# EAGLE board SparkFun_Humidity_Sensor_Breakout-HIH-4030_Panel_v10 (EAGLE 7.4.0)
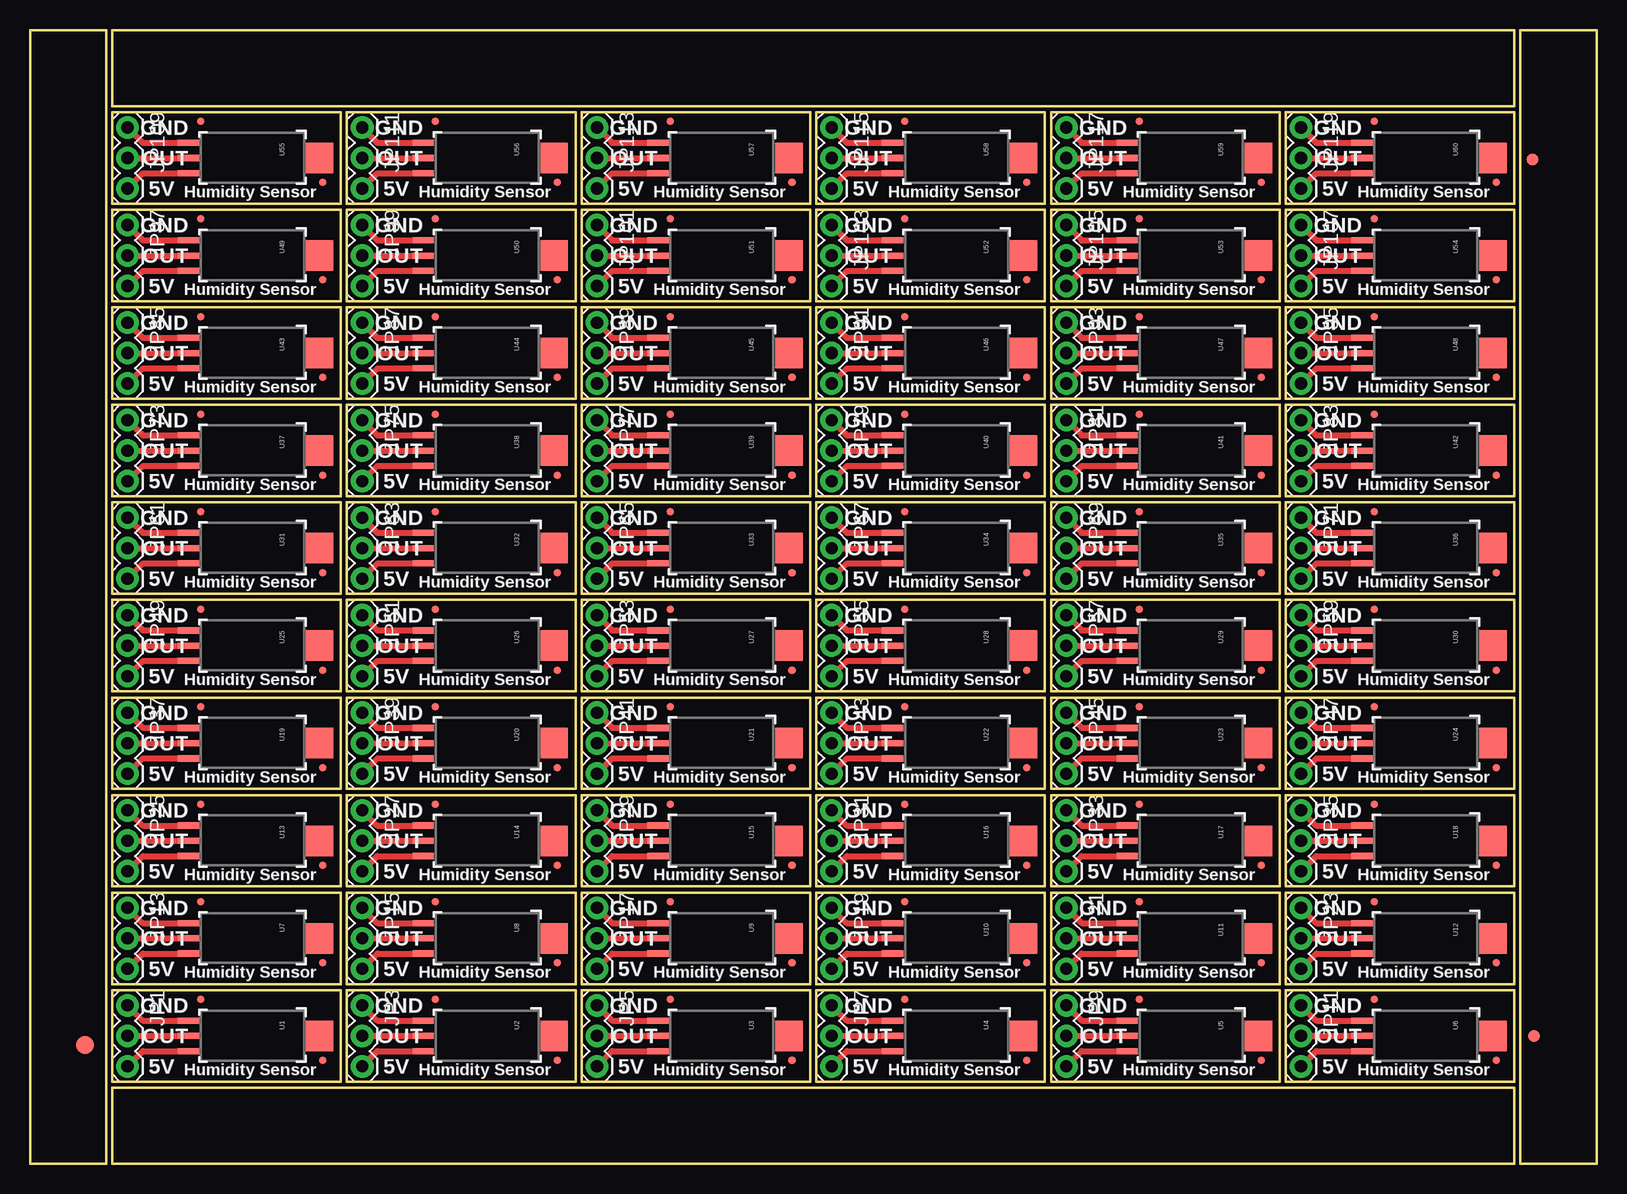
[diagram p0: board, top side]
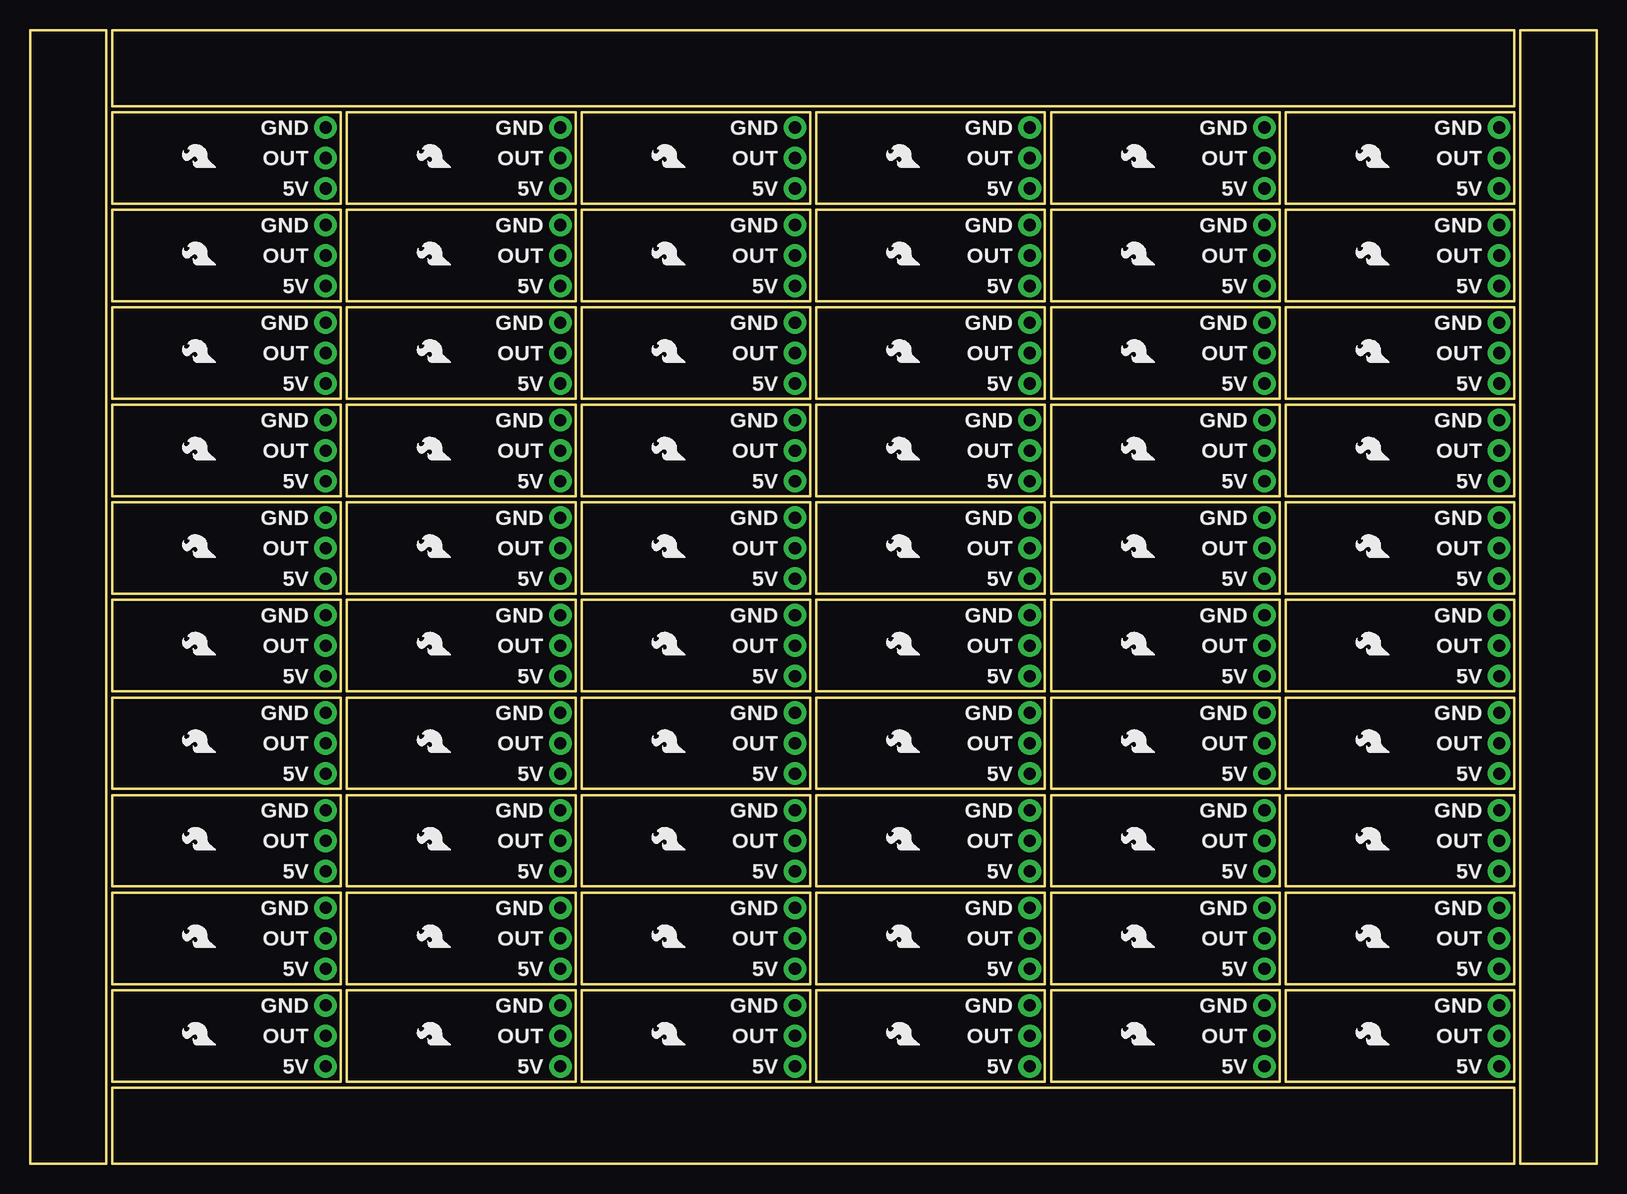
[diagram p1: board, bottom side, seen from below]

Size 130.56 x 94.49 mm. Coordinates in mm from the lower left corner, seen from the top.
Outline: 6.35,79.25 6.35,0 0,0 0,29.72
Outline: 0,27.18 0,94.49 6.35,94.49 6.35,76.71
Outline: 79.25,0 6.86,0 6.86,6.35 29.72,6.35
Outline: 27.18,6.35 123.7,6.35 123.7,0 76.71,0
Outline: 130.56,79.25 130.56,0 124.21,0 124.21,29.72
Outline: 124.21,27.18 124.21,94.49 130.56,94.49 130.56,76.71
Outline: 51.31,94.49 123.7,94.49 123.7,88.14 100.84,88.14
Outline: 103.38,88.14 6.86,88.14 6.86,94.49 53.85,94.49
Outline: 6.86,6.86 25.91,6.86 25.91,14.48 6.86,14.48 6.86,6.86
Outline: 26.42,6.86 45.47,6.86 45.47,14.48 26.42,14.48 26.42,6.86
Outline: 45.97,6.86 65.02,6.86 65.02,14.48 45.97,14.48 45.97,6.86
Outline: 65.53,6.86 84.58,6.86 84.58,14.48 65.53,14.48 65.53,6.86
Outline: 85.09,6.86 104.14,6.86 104.14,14.48 85.09,14.48 85.09,6.86
Outline: 104.65,6.86 123.7,6.86 123.7,14.48 104.65,14.48 104.65,6.86
Outline: 6.86,14.99 25.91,14.99 25.91,22.61 6.86,22.61 6.86,14.99
Outline: 26.42,14.99 45.47,14.99 45.47,22.61 26.42,22.61 26.42,14.99
Outline: 45.97,14.99 65.02,14.99 65.02,22.61 45.97,22.61 45.97,14.99
Outline: 65.53,14.99 84.58,14.99 84.58,22.61 65.53,22.61 65.53,14.99
Outline: 85.09,14.99 104.14,14.99 104.14,22.61 85.09,22.61 85.09,14.99
Outline: 104.65,14.99 123.7,14.99 123.7,22.61 104.65,22.61 104.65,14.99
Outline: 6.86,23.11 25.91,23.11 25.91,30.73 6.86,30.73 6.86,23.11
Outline: 26.42,23.11 45.47,23.11 45.47,30.73 26.42,30.73 26.42,23.11
Outline: 45.97,23.11 65.02,23.11 65.02,30.73 45.97,30.73 45.97,23.11
Outline: 65.53,23.11 84.58,23.11 84.58,30.73 65.53,30.73 65.53,23.11
Outline: 85.09,23.11 104.14,23.11 104.14,30.73 85.09,30.73 85.09,23.11
Outline: 104.65,23.11 123.7,23.11 123.7,30.73 104.65,30.73 104.65,23.11
Outline: 6.86,31.24 25.91,31.24 25.91,38.86 6.86,38.86 6.86,31.24
Outline: 26.42,31.24 45.47,31.24 45.47,38.86 26.42,38.86 26.42,31.24
Outline: 45.97,31.24 65.02,31.24 65.02,38.86 45.97,38.86 45.97,31.24
Outline: 65.53,31.24 84.58,31.24 84.58,38.86 65.53,38.86 65.53,31.24
Outline: 85.09,31.24 104.14,31.24 104.14,38.86 85.09,38.86 85.09,31.24
Outline: 104.65,31.24 123.7,31.24 123.7,38.86 104.65,38.86 104.65,31.24
Outline: 6.86,39.37 25.91,39.37 25.91,46.99 6.86,46.99 6.86,39.37
Outline: 26.42,39.37 45.47,39.37 45.47,46.99 26.42,46.99 26.42,39.37
Outline: 45.97,39.37 65.02,39.37 65.02,46.99 45.97,46.99 45.97,39.37
Outline: 65.53,39.37 84.58,39.37 84.58,46.99 65.53,46.99 65.53,39.37
Outline: 85.09,39.37 104.14,39.37 104.14,46.99 85.09,46.99 85.09,39.37
Outline: 104.65,39.37 123.7,39.37 123.7,46.99 104.65,46.99 104.65,39.37
Outline: 6.86,47.5 25.91,47.5 25.91,55.12 6.86,55.12 6.86,47.5
Outline: 26.42,47.5 45.47,47.5 45.47,55.12 26.42,55.12 26.42,47.5
Outline: 45.97,47.5 65.02,47.5 65.02,55.12 45.97,55.12 45.97,47.5
Outline: 65.53,47.5 84.58,47.5 84.58,55.12 65.53,55.12 65.53,47.5
Outline: 85.09,47.5 104.14,47.5 104.14,55.12 85.09,55.12 85.09,47.5
Outline: 104.65,47.5 123.7,47.5 123.7,55.12 104.65,55.12 104.65,47.5
Outline: 6.86,55.63 25.91,55.63 25.91,63.25 6.86,63.25 6.86,55.63
Outline: 26.42,55.63 45.47,55.63 45.47,63.25 26.42,63.25 26.42,55.63
Outline: 45.97,55.63 65.02,55.63 65.02,63.25 45.97,63.25 45.97,55.63
Outline: 65.53,55.63 84.58,55.63 84.58,63.25 65.53,63.25 65.53,55.63
Outline: 85.09,55.63 104.14,55.63 104.14,63.25 85.09,63.25 85.09,55.63
Outline: 104.65,55.63 123.7,55.63 123.7,63.25 104.65,63.25 104.65,55.63
Outline: 6.86,63.75 25.91,63.75 25.91,71.37 6.86,71.37 6.86,63.75
Outline: 26.42,63.75 45.47,63.75 45.47,71.37 26.42,71.37 26.42,63.75
Outline: 45.97,63.75 65.02,63.75 65.02,71.37 45.97,71.37 45.97,63.75
Outline: 65.53,63.75 84.58,63.75 84.58,71.37 65.53,71.37 65.53,63.75
Outline: 85.09,63.75 104.14,63.75 104.14,71.37 85.09,71.37 85.09,63.75
Outline: 104.65,63.75 123.7,63.75 123.7,71.37 104.65,71.37 104.65,63.75
Outline: 6.86,71.88 25.91,71.88 25.91,79.5 6.86,79.5 6.86,71.88
Outline: 26.42,71.88 45.47,71.88 45.47,79.5 26.42,79.5 26.42,71.88
Outline: 45.97,71.88 65.02,71.88 65.02,79.5 45.97,79.5 45.97,71.88
Outline: 65.53,71.88 84.58,71.88 84.58,79.5 65.53,79.5 65.53,71.88
Outline: 85.09,71.88 104.14,71.88 104.14,79.5 85.09,79.5 85.09,71.88
Outline: 104.65,71.88 123.7,71.88 123.7,79.5 104.65,79.5 104.65,71.88
Outline: 6.86,80.01 25.91,80.01 25.91,87.63 6.86,87.63 6.86,80.01
Outline: 26.42,80.01 45.47,80.01 45.47,87.63 26.42,87.63 26.42,80.01
Outline: 45.97,80.01 65.02,80.01 65.02,87.63 45.97,87.63 45.97,80.01
Outline: 65.53,80.01 84.58,80.01 84.58,87.63 65.53,87.63 65.53,80.01
Outline: 85.09,80.01 104.14,80.01 104.14,87.63 85.09,87.63 85.09,80.01
Outline: 104.65,80.01 123.7,80.01 123.7,87.63 104.65,87.63 104.65,80.01
Copper layers (1*16): Top 0.035mm / dielectric 1.5mm / Bottom 0.035mm
Design rules "SparkFun": minimum track width 8mil, minimum drill 20mil, track to track 8mil, track to pad 8mil, pad to pad 8mil, via to via 8mil, smd to smd 8mil, copper to edge 9mil, drill to drill 8mil, minimum pad ring 12mil, minimum via ring 10mil, stop-mask expansion 4mil, vias tented up to drill 20mil, thermal gap 10mil

## Footprints (pad centres in the part's own frame; a part is rotated, then mirrored left to right if it is on the bottom)
FIDUCIAL-1.5X3 = smd 1.5 x 1.5: 1 0,0
FIDUCIAL-1X2 = smd 1 x 1: 1 0,0
MICRO-FIDUCIAL = smd 0.635 x 0.635: 1 0,0
1X03 = drill 1.016 pad 1.88: 1 0,0; 2 2.54,0; 3 5.08,0
HIH-4030 = smd 0.508 x 1.778: 1 -1.27,-5.08; 2 0,-5.08; 3 1.27,-5.08 | smd 2.54 x 2.286: NC 0,5.842

## Placement (x,y rotation side)
E$1  [FIDUCIAL-1.5X3]  4.57,9.91 0 top
E$5  [FIDUCIAL-1X2]  125.35,10.67 0 top
E$7  [FIDUCIAL-1X2]  125.22,83.69 90 top
FID1  FIDUCIALUFIDUCIAL  [MICRO-FIDUCIAL]  14.22,13.72 0 top
FID2  FIDUCIALUFIDUCIAL  [MICRO-FIDUCIAL]  24.38,8.64 0 top
FID3  FIDUCIALUFIDUCIAL  [MICRO-FIDUCIAL]  33.78,13.72 0 top
FID4  FIDUCIALUFIDUCIAL  [MICRO-FIDUCIAL]  43.94,8.64 0 top
FID5  FIDUCIALUFIDUCIAL  [MICRO-FIDUCIAL]  53.34,13.72 0 top
FID6  FIDUCIALUFIDUCIAL  [MICRO-FIDUCIAL]  63.5,8.64 0 top
FID7  FIDUCIALUFIDUCIAL  [MICRO-FIDUCIAL]  72.9,13.72 0 top
FID8  FIDUCIALUFIDUCIAL  [MICRO-FIDUCIAL]  83.06,8.64 0 top
FID9  FIDUCIALUFIDUCIAL  [MICRO-FIDUCIAL]  92.46,13.72 0 top
FID10  FIDUCIALUFIDUCIAL  [MICRO-FIDUCIAL]  102.62,8.64 0 top
FID11  FIDUCIALUFIDUCIAL  [MICRO-FIDUCIAL]  112.01,13.72 0 top
FID12  FIDUCIALUFIDUCIAL  [MICRO-FIDUCIAL]  122.17,8.64 0 top
FID13  FIDUCIALUFIDUCIAL  [MICRO-FIDUCIAL]  14.22,21.84 0 top
FID14  FIDUCIALUFIDUCIAL  [MICRO-FIDUCIAL]  24.38,16.76 0 top
FID15  FIDUCIALUFIDUCIAL  [MICRO-FIDUCIAL]  33.78,21.84 0 top
FID16  FIDUCIALUFIDUCIAL  [MICRO-FIDUCIAL]  43.94,16.76 0 top
FID17  FIDUCIALUFIDUCIAL  [MICRO-FIDUCIAL]  53.34,21.84 0 top
FID18  FIDUCIALUFIDUCIAL  [MICRO-FIDUCIAL]  63.5,16.76 0 top
FID19  FIDUCIALUFIDUCIAL  [MICRO-FIDUCIAL]  72.9,21.84 0 top
FID20  FIDUCIALUFIDUCIAL  [MICRO-FIDUCIAL]  83.06,16.76 0 top
FID21  FIDUCIALUFIDUCIAL  [MICRO-FIDUCIAL]  92.46,21.84 0 top
FID22  FIDUCIALUFIDUCIAL  [MICRO-FIDUCIAL]  102.62,16.76 0 top
FID23  FIDUCIALUFIDUCIAL  [MICRO-FIDUCIAL]  112.01,21.84 0 top
FID24  FIDUCIALUFIDUCIAL  [MICRO-FIDUCIAL]  122.17,16.76 0 top
FID25  FIDUCIALUFIDUCIAL  [MICRO-FIDUCIAL]  14.22,29.97 0 top
FID26  FIDUCIALUFIDUCIAL  [MICRO-FIDUCIAL]  24.38,24.89 0 top
FID27  FIDUCIALUFIDUCIAL  [MICRO-FIDUCIAL]  33.78,29.97 0 top
FID28  FIDUCIALUFIDUCIAL  [MICRO-FIDUCIAL]  43.94,24.89 0 top
FID29  FIDUCIALUFIDUCIAL  [MICRO-FIDUCIAL]  53.34,29.97 0 top
FID30  FIDUCIALUFIDUCIAL  [MICRO-FIDUCIAL]  63.5,24.89 0 top
FID31  FIDUCIALUFIDUCIAL  [MICRO-FIDUCIAL]  72.9,29.97 0 top
FID32  FIDUCIALUFIDUCIAL  [MICRO-FIDUCIAL]  83.06,24.89 0 top
FID33  FIDUCIALUFIDUCIAL  [MICRO-FIDUCIAL]  92.46,29.97 0 top
FID34  FIDUCIALUFIDUCIAL  [MICRO-FIDUCIAL]  102.62,24.89 0 top
FID35  FIDUCIALUFIDUCIAL  [MICRO-FIDUCIAL]  112.01,29.97 0 top
FID36  FIDUCIALUFIDUCIAL  [MICRO-FIDUCIAL]  122.17,24.89 0 top
FID37  FIDUCIALUFIDUCIAL  [MICRO-FIDUCIAL]  14.22,38.1 0 top
FID38  FIDUCIALUFIDUCIAL  [MICRO-FIDUCIAL]  24.38,33.02 0 top
FID39  FIDUCIALUFIDUCIAL  [MICRO-FIDUCIAL]  33.78,38.1 0 top
FID40  FIDUCIALUFIDUCIAL  [MICRO-FIDUCIAL]  43.94,33.02 0 top
FID41  FIDUCIALUFIDUCIAL  [MICRO-FIDUCIAL]  53.34,38.1 0 top
FID42  FIDUCIALUFIDUCIAL  [MICRO-FIDUCIAL]  63.5,33.02 0 top
FID43  FIDUCIALUFIDUCIAL  [MICRO-FIDUCIAL]  72.9,38.1 0 top
FID44  FIDUCIALUFIDUCIAL  [MICRO-FIDUCIAL]  83.06,33.02 0 top
FID45  FIDUCIALUFIDUCIAL  [MICRO-FIDUCIAL]  92.46,38.1 0 top
FID46  FIDUCIALUFIDUCIAL  [MICRO-FIDUCIAL]  102.62,33.02 0 top
FID47  FIDUCIALUFIDUCIAL  [MICRO-FIDUCIAL]  112.01,38.1 0 top
FID48  FIDUCIALUFIDUCIAL  [MICRO-FIDUCIAL]  122.17,33.02 0 top
FID49  FIDUCIALUFIDUCIAL  [MICRO-FIDUCIAL]  14.22,46.23 0 top
FID50  FIDUCIALUFIDUCIAL  [MICRO-FIDUCIAL]  24.38,41.15 0 top
FID51  FIDUCIALUFIDUCIAL  [MICRO-FIDUCIAL]  33.78,46.23 0 top
FID52  FIDUCIALUFIDUCIAL  [MICRO-FIDUCIAL]  43.94,41.15 0 top
FID53  FIDUCIALUFIDUCIAL  [MICRO-FIDUCIAL]  53.34,46.23 0 top
FID54  FIDUCIALUFIDUCIAL  [MICRO-FIDUCIAL]  63.5,41.15 0 top
FID55  FIDUCIALUFIDUCIAL  [MICRO-FIDUCIAL]  72.9,46.23 0 top
FID56  FIDUCIALUFIDUCIAL  [MICRO-FIDUCIAL]  83.06,41.15 0 top
FID57  FIDUCIALUFIDUCIAL  [MICRO-FIDUCIAL]  92.46,46.23 0 top
FID58  FIDUCIALUFIDUCIAL  [MICRO-FIDUCIAL]  102.62,41.15 0 top
FID59  FIDUCIALUFIDUCIAL  [MICRO-FIDUCIAL]  112.01,46.23 0 top
FID60  FIDUCIALUFIDUCIAL  [MICRO-FIDUCIAL]  122.17,41.15 0 top
FID61  FIDUCIALUFIDUCIAL  [MICRO-FIDUCIAL]  14.22,54.36 0 top
FID62  FIDUCIALUFIDUCIAL  [MICRO-FIDUCIAL]  24.38,49.28 0 top
FID63  FIDUCIALUFIDUCIAL  [MICRO-FIDUCIAL]  33.78,54.36 0 top
FID64  FIDUCIALUFIDUCIAL  [MICRO-FIDUCIAL]  43.94,49.28 0 top
FID65  FIDUCIALUFIDUCIAL  [MICRO-FIDUCIAL]  53.34,54.36 0 top
FID66  FIDUCIALUFIDUCIAL  [MICRO-FIDUCIAL]  63.5,49.28 0 top
FID67  FIDUCIALUFIDUCIAL  [MICRO-FIDUCIAL]  72.9,54.36 0 top
FID68  FIDUCIALUFIDUCIAL  [MICRO-FIDUCIAL]  83.06,49.28 0 top
FID69  FIDUCIALUFIDUCIAL  [MICRO-FIDUCIAL]  92.46,54.36 0 top
FID70  FIDUCIALUFIDUCIAL  [MICRO-FIDUCIAL]  102.62,49.28 0 top
FID71  FIDUCIALUFIDUCIAL  [MICRO-FIDUCIAL]  112.01,54.36 0 top
FID72  FIDUCIALUFIDUCIAL  [MICRO-FIDUCIAL]  122.17,49.28 0 top
FID73  FIDUCIALUFIDUCIAL  [MICRO-FIDUCIAL]  14.22,62.48 0 top
FID74  FIDUCIALUFIDUCIAL  [MICRO-FIDUCIAL]  24.38,57.4 0 top
FID75  FIDUCIALUFIDUCIAL  [MICRO-FIDUCIAL]  33.78,62.48 0 top
FID76  FIDUCIALUFIDUCIAL  [MICRO-FIDUCIAL]  43.94,57.4 0 top
FID77  FIDUCIALUFIDUCIAL  [MICRO-FIDUCIAL]  53.34,62.48 0 top
FID78  FIDUCIALUFIDUCIAL  [MICRO-FIDUCIAL]  63.5,57.4 0 top
FID79  FIDUCIALUFIDUCIAL  [MICRO-FIDUCIAL]  72.9,62.48 0 top
FID80  FIDUCIALUFIDUCIAL  [MICRO-FIDUCIAL]  83.06,57.4 0 top
FID81  FIDUCIALUFIDUCIAL  [MICRO-FIDUCIAL]  92.46,62.48 0 top
FID82  FIDUCIALUFIDUCIAL  [MICRO-FIDUCIAL]  102.62,57.4 0 top
FID83  FIDUCIALUFIDUCIAL  [MICRO-FIDUCIAL]  112.01,62.48 0 top
FID84  FIDUCIALUFIDUCIAL  [MICRO-FIDUCIAL]  122.17,57.4 0 top
FID85  FIDUCIALUFIDUCIAL  [MICRO-FIDUCIAL]  14.22,70.61 0 top
FID86  FIDUCIALUFIDUCIAL  [MICRO-FIDUCIAL]  24.38,65.53 0 top
FID87  FIDUCIALUFIDUCIAL  [MICRO-FIDUCIAL]  33.78,70.61 0 top
FID88  FIDUCIALUFIDUCIAL  [MICRO-FIDUCIAL]  43.94,65.53 0 top
FID89  FIDUCIALUFIDUCIAL  [MICRO-FIDUCIAL]  53.34,70.61 0 top
FID90  FIDUCIALUFIDUCIAL  [MICRO-FIDUCIAL]  63.5,65.53 0 top
FID91  FIDUCIALUFIDUCIAL  [MICRO-FIDUCIAL]  72.9,70.61 0 top
FID92  FIDUCIALUFIDUCIAL  [MICRO-FIDUCIAL]  83.06,65.53 0 top
FID93  FIDUCIALUFIDUCIAL  [MICRO-FIDUCIAL]  92.46,70.61 0 top
FID94  FIDUCIALUFIDUCIAL  [MICRO-FIDUCIAL]  102.62,65.53 0 top
FID95  FIDUCIALUFIDUCIAL  [MICRO-FIDUCIAL]  112.01,70.61 0 top
FID96  FIDUCIALUFIDUCIAL  [MICRO-FIDUCIAL]  122.17,65.53 0 top
FID97  FIDUCIALUFIDUCIAL  [MICRO-FIDUCIAL]  14.22,78.74 0 top
FID98  FIDUCIALUFIDUCIAL  [MICRO-FIDUCIAL]  24.38,73.66 0 top
FID99  FIDUCIALUFIDUCIAL  [MICRO-FIDUCIAL]  33.78,78.74 0 top
FID100  FIDUCIALUFIDUCIAL  [MICRO-FIDUCIAL]  43.94,73.66 0 top
FID101  FIDUCIALUFIDUCIAL  [MICRO-FIDUCIAL]  53.34,78.74 0 top
FID102  FIDUCIALUFIDUCIAL  [MICRO-FIDUCIAL]  63.5,73.66 0 top
FID103  FIDUCIALUFIDUCIAL  [MICRO-FIDUCIAL]  72.9,78.74 0 top
FID104  FIDUCIALUFIDUCIAL  [MICRO-FIDUCIAL]  83.06,73.66 0 top
FID105  FIDUCIALUFIDUCIAL  [MICRO-FIDUCIAL]  92.46,78.74 0 top
FID106  FIDUCIALUFIDUCIAL  [MICRO-FIDUCIAL]  102.62,73.66 0 top
FID107  FIDUCIALUFIDUCIAL  [MICRO-FIDUCIAL]  112.01,78.74 0 top
FID108  FIDUCIALUFIDUCIAL  [MICRO-FIDUCIAL]  122.17,73.66 0 top
FID109  FIDUCIALUFIDUCIAL  [MICRO-FIDUCIAL]  14.22,86.87 0 top
FID110  FIDUCIALUFIDUCIAL  [MICRO-FIDUCIAL]  24.38,81.79 0 top
FID111  FIDUCIALUFIDUCIAL  [MICRO-FIDUCIAL]  33.78,86.87 0 top
FID112  FIDUCIALUFIDUCIAL  [MICRO-FIDUCIAL]  43.94,81.79 0 top
FID113  FIDUCIALUFIDUCIAL  [MICRO-FIDUCIAL]  53.34,86.87 0 top
FID114  FIDUCIALUFIDUCIAL  [MICRO-FIDUCIAL]  63.5,81.79 0 top
FID115  FIDUCIALUFIDUCIAL  [MICRO-FIDUCIAL]  72.9,86.87 0 top
FID116  FIDUCIALUFIDUCIAL  [MICRO-FIDUCIAL]  83.06,81.79 0 top
FID117  FIDUCIALUFIDUCIAL  [MICRO-FIDUCIAL]  92.46,86.87 0 top
FID118  FIDUCIALUFIDUCIAL  [MICRO-FIDUCIAL]  102.62,81.79 0 top
FID119  FIDUCIALUFIDUCIAL  [MICRO-FIDUCIAL]  112.01,86.87 0 top
FID120  FIDUCIALUFIDUCIAL  [MICRO-FIDUCIAL]  122.17,81.79 0 top
JP1  [1X03]  8.13,13.21 270 top
JP2  LOGO-SFESK  [SFE-LOGO-FLAME]  17.27,9.91 90 bottom
JP3  [1X03]  27.69,13.21 270 top
JP4  LOGO-SFESK  [SFE-LOGO-FLAME]  36.83,9.91 90 bottom
JP5  [1X03]  47.24,13.21 270 top
JP6  LOGO-SFESK  [SFE-LOGO-FLAME]  56.39,9.91 90 bottom
JP7  [1X03]  66.8,13.21 270 top
JP8  LOGO-SFESK  [SFE-LOGO-FLAME]  75.95,9.91 90 bottom
JP9  [1X03]  86.36,13.21 270 top
JP10  LOGO-SFESK  [SFE-LOGO-FLAME]  95.5,9.91 90 bottom
JP11  [1X03]  105.92,13.21 270 top
JP12  LOGO-SFESK  [SFE-LOGO-FLAME]  115.06,9.91 90 bottom
JP13  [1X03]  8.13,21.34 270 top
JP14  LOGO-SFESK  [SFE-LOGO-FLAME]  17.27,18.03 90 bottom
JP15  [1X03]  27.69,21.34 270 top
JP16  LOGO-SFESK  [SFE-LOGO-FLAME]  36.83,18.03 90 bottom
JP17  [1X03]  47.24,21.34 270 top
JP18  LOGO-SFESK  [SFE-LOGO-FLAME]  56.39,18.03 90 bottom
JP19  [1X03]  66.8,21.34 270 top
JP20  LOGO-SFESK  [SFE-LOGO-FLAME]  75.95,18.03 90 bottom
JP21  [1X03]  86.36,21.34 270 top
JP22  LOGO-SFESK  [SFE-LOGO-FLAME]  95.5,18.03 90 bottom
JP23  [1X03]  105.92,21.34 270 top
JP24  LOGO-SFESK  [SFE-LOGO-FLAME]  115.06,18.03 90 bottom
JP25  [1X03]  8.13,29.46 270 top
JP26  LOGO-SFESK  [SFE-LOGO-FLAME]  17.27,26.16 90 bottom
JP27  [1X03]  27.69,29.46 270 top
JP28  LOGO-SFESK  [SFE-LOGO-FLAME]  36.83,26.16 90 bottom
JP29  [1X03]  47.24,29.46 270 top
JP30  LOGO-SFESK  [SFE-LOGO-FLAME]  56.39,26.16 90 bottom
JP31  [1X03]  66.8,29.46 270 top
JP32  LOGO-SFESK  [SFE-LOGO-FLAME]  75.95,26.16 90 bottom
JP33  [1X03]  86.36,29.46 270 top
JP34  LOGO-SFESK  [SFE-LOGO-FLAME]  95.5,26.16 90 bottom
JP35  [1X03]  105.92,29.46 270 top
JP36  LOGO-SFESK  [SFE-LOGO-FLAME]  115.06,26.16 90 bottom
JP37  [1X03]  8.13,37.59 270 top
JP38  LOGO-SFESK  [SFE-LOGO-FLAME]  17.27,34.29 90 bottom
JP39  [1X03]  27.69,37.59 270 top
JP40  LOGO-SFESK  [SFE-LOGO-FLAME]  36.83,34.29 90 bottom
JP41  [1X03]  47.24,37.59 270 top
JP42  LOGO-SFESK  [SFE-LOGO-FLAME]  56.39,34.29 90 bottom
JP43  [1X03]  66.8,37.59 270 top
JP44  LOGO-SFESK  [SFE-LOGO-FLAME]  75.95,34.29 90 bottom
JP45  [1X03]  86.36,37.59 270 top
JP46  LOGO-SFESK  [SFE-LOGO-FLAME]  95.5,34.29 90 bottom
JP47  [1X03]  105.92,37.59 270 top
JP48  LOGO-SFESK  [SFE-LOGO-FLAME]  115.06,34.29 90 bottom
JP49  [1X03]  8.13,45.72 270 top
JP50  LOGO-SFESK  [SFE-LOGO-FLAME]  17.27,42.42 90 bottom
JP51  [1X03]  27.69,45.72 270 top
JP52  LOGO-SFESK  [SFE-LOGO-FLAME]  36.83,42.42 90 bottom
JP53  [1X03]  47.24,45.72 270 top
JP54  LOGO-SFESK  [SFE-LOGO-FLAME]  56.39,42.42 90 bottom
JP55  [1X03]  66.8,45.72 270 top
JP56  LOGO-SFESK  [SFE-LOGO-FLAME]  75.95,42.42 90 bottom
JP57  [1X03]  86.36,45.72 270 top
JP58  LOGO-SFESK  [SFE-LOGO-FLAME]  95.5,42.42 90 bottom
JP59  [1X03]  105.92,45.72 270 top
JP60  LOGO-SFESK  [SFE-LOGO-FLAME]  115.06,42.42 90 bottom
JP61  [1X03]  8.13,53.85 270 top
JP62  LOGO-SFESK  [SFE-LOGO-FLAME]  17.27,50.55 90 bottom
JP63  [1X03]  27.69,53.85 270 top
JP64  LOGO-SFESK  [SFE-LOGO-FLAME]  36.83,50.55 90 bottom
JP65  [1X03]  47.24,53.85 270 top
JP66  LOGO-SFESK  [SFE-LOGO-FLAME]  56.39,50.55 90 bottom
JP67  [1X03]  66.8,53.85 270 top
JP68  LOGO-SFESK  [SFE-LOGO-FLAME]  75.95,50.55 90 bottom
JP69  [1X03]  86.36,53.85 270 top
JP70  LOGO-SFESK  [SFE-LOGO-FLAME]  95.5,50.55 90 bottom
JP71  [1X03]  105.92,53.85 270 top
JP72  LOGO-SFESK  [SFE-LOGO-FLAME]  115.06,50.55 90 bottom
JP73  [1X03]  8.13,61.98 270 top
JP74  LOGO-SFESK  [SFE-LOGO-FLAME]  17.27,58.67 90 bottom
JP75  [1X03]  27.69,61.98 270 top
JP76  LOGO-SFESK  [SFE-LOGO-FLAME]  36.83,58.67 90 bottom
JP77  [1X03]  47.24,61.98 270 top
JP78  LOGO-SFESK  [SFE-LOGO-FLAME]  56.39,58.67 90 bottom
JP79  [1X03]  66.8,61.98 270 top
JP80  LOGO-SFESK  [SFE-LOGO-FLAME]  75.95,58.67 90 bottom
JP81  [1X03]  86.36,61.98 270 top
JP82  LOGO-SFESK  [SFE-LOGO-FLAME]  95.5,58.67 90 bottom
JP83  [1X03]  105.92,61.98 270 top
JP84  LOGO-SFESK  [SFE-LOGO-FLAME]  115.06,58.67 90 bottom
JP85  [1X03]  8.13,70.1 270 top
JP86  LOGO-SFESK  [SFE-LOGO-FLAME]  17.27,66.8 90 bottom
JP87  [1X03]  27.69,70.1 270 top
JP88  LOGO-SFESK  [SFE-LOGO-FLAME]  36.83,66.8 90 bottom
JP89  [1X03]  47.24,70.1 270 top
JP90  LOGO-SFESK  [SFE-LOGO-FLAME]  56.39,66.8 90 bottom
JP91  [1X03]  66.8,70.1 270 top
JP92  LOGO-SFESK  [SFE-LOGO-FLAME]  75.95,66.8 90 bottom
JP93  [1X03]  86.36,70.1 270 top
JP94  LOGO-SFESK  [SFE-LOGO-FLAME]  95.5,66.8 90 bottom
JP95  [1X03]  105.92,70.1 270 top
JP96  LOGO-SFESK  [SFE-LOGO-FLAME]  115.06,66.8 90 bottom
JP97  [1X03]  8.13,78.23 270 top
JP98  LOGO-SFESK  [SFE-LOGO-FLAME]  17.27,74.93 90 bottom
JP99  [1X03]  27.69,78.23 270 top
JP100  LOGO-SFESK  [SFE-LOGO-FLAME]  36.83,74.93 90 bottom
JP101  [1X03]  47.24,78.23 270 top
JP102  LOGO-SFESK  [SFE-LOGO-FLAME]  56.39,74.93 90 bottom
JP103  [1X03]  66.8,78.23 270 top
JP104  LOGO-SFESK  [SFE-LOGO-FLAME]  75.95,74.93 90 bottom
JP105  [1X03]  86.36,78.23 270 top
JP106  LOGO-SFESK  [SFE-LOGO-FLAME]  95.5,74.93 90 bottom
JP107  [1X03]  105.92,78.23 270 top
JP108  LOGO-SFESK  [SFE-LOGO-FLAME]  115.06,74.93 90 bottom
JP109  [1X03]  8.13,86.36 270 top
JP110  LOGO-SFESK  [SFE-LOGO-FLAME]  17.27,83.06 90 bottom
JP111  [1X03]  27.69,86.36 270 top
JP112  LOGO-SFESK  [SFE-LOGO-FLAME]  36.83,83.06 90 bottom
JP113  [1X03]  47.24,86.36 270 top
JP114  LOGO-SFESK  [SFE-LOGO-FLAME]  56.39,83.06 90 bottom
JP115  [1X03]  66.8,86.36 270 top
JP116  LOGO-SFESK  [SFE-LOGO-FLAME]  75.95,83.06 90 bottom
JP117  [1X03]  86.36,86.36 270 top
JP118  LOGO-SFESK  [SFE-LOGO-FLAME]  95.5,83.06 90 bottom
JP119  [1X03]  105.92,86.36 270 top
JP120  LOGO-SFESK  [SFE-LOGO-FLAME]  115.06,83.06 90 bottom
U1  HIH-4030SMD  [HIH-4030]  18.29,10.67 270 top
U2  HIH-4030SMD  [HIH-4030]  37.85,10.67 270 top
U3  HIH-4030SMD  [HIH-4030]  57.4,10.67 270 top
U4  HIH-4030SMD  [HIH-4030]  76.96,10.67 270 top
U5  HIH-4030SMD  [HIH-4030]  96.52,10.67 270 top
U6  HIH-4030SMD  [HIH-4030]  116.08,10.67 270 top
U7  HIH-4030SMD  [HIH-4030]  18.29,18.8 270 top
U8  HIH-4030SMD  [HIH-4030]  37.85,18.8 270 top
U9  HIH-4030SMD  [HIH-4030]  57.4,18.8 270 top
U10  HIH-4030SMD  [HIH-4030]  76.96,18.8 270 top
U11  HIH-4030SMD  [HIH-4030]  96.52,18.8 270 top
U12  HIH-4030SMD  [HIH-4030]  116.08,18.8 270 top
U13  HIH-4030SMD  [HIH-4030]  18.29,26.92 270 top
U14  HIH-4030SMD  [HIH-4030]  37.85,26.92 270 top
U15  HIH-4030SMD  [HIH-4030]  57.4,26.92 270 top
U16  HIH-4030SMD  [HIH-4030]  76.96,26.92 270 top
U17  HIH-4030SMD  [HIH-4030]  96.52,26.92 270 top
U18  HIH-4030SMD  [HIH-4030]  116.08,26.92 270 top
U19  HIH-4030SMD  [HIH-4030]  18.29,35.05 270 top
U20  HIH-4030SMD  [HIH-4030]  37.85,35.05 270 top
U21  HIH-4030SMD  [HIH-4030]  57.4,35.05 270 top
U22  HIH-4030SMD  [HIH-4030]  76.96,35.05 270 top
U23  HIH-4030SMD  [HIH-4030]  96.52,35.05 270 top
U24  HIH-4030SMD  [HIH-4030]  116.08,35.05 270 top
U25  HIH-4030SMD  [HIH-4030]  18.29,43.18 270 top
U26  HIH-4030SMD  [HIH-4030]  37.85,43.18 270 top
U27  HIH-4030SMD  [HIH-4030]  57.4,43.18 270 top
U28  HIH-4030SMD  [HIH-4030]  76.96,43.18 270 top
U29  HIH-4030SMD  [HIH-4030]  96.52,43.18 270 top
U30  HIH-4030SMD  [HIH-4030]  116.08,43.18 270 top
U31  HIH-4030SMD  [HIH-4030]  18.29,51.31 270 top
U32  HIH-4030SMD  [HIH-4030]  37.85,51.31 270 top
U33  HIH-4030SMD  [HIH-4030]  57.4,51.31 270 top
U34  HIH-4030SMD  [HIH-4030]  76.96,51.31 270 top
U35  HIH-4030SMD  [HIH-4030]  96.52,51.31 270 top
U36  HIH-4030SMD  [HIH-4030]  116.08,51.31 270 top
U37  HIH-4030SMD  [HIH-4030]  18.29,59.44 270 top
U38  HIH-4030SMD  [HIH-4030]  37.85,59.44 270 top
U39  HIH-4030SMD  [HIH-4030]  57.4,59.44 270 top
U40  HIH-4030SMD  [HIH-4030]  76.96,59.44 270 top
U41  HIH-4030SMD  [HIH-4030]  96.52,59.44 270 top
U42  HIH-4030SMD  [HIH-4030]  116.08,59.44 270 top
U43  HIH-4030SMD  [HIH-4030]  18.29,67.56 270 top
U44  HIH-4030SMD  [HIH-4030]  37.85,67.56 270 top
U45  HIH-4030SMD  [HIH-4030]  57.4,67.56 270 top
U46  HIH-4030SMD  [HIH-4030]  76.96,67.56 270 top
U47  HIH-4030SMD  [HIH-4030]  96.52,67.56 270 top
U48  HIH-4030SMD  [HIH-4030]  116.08,67.56 270 top
U49  HIH-4030SMD  [HIH-4030]  18.29,75.69 270 top
U50  HIH-4030SMD  [HIH-4030]  37.85,75.69 270 top
U51  HIH-4030SMD  [HIH-4030]  57.4,75.69 270 top
U52  HIH-4030SMD  [HIH-4030]  76.96,75.69 270 top
U53  HIH-4030SMD  [HIH-4030]  96.52,75.69 270 top
U54  HIH-4030SMD  [HIH-4030]  116.08,75.69 270 top
U55  HIH-4030SMD  [HIH-4030]  18.29,83.82 270 top
U56  HIH-4030SMD  [HIH-4030]  37.85,83.82 270 top
U57  HIH-4030SMD  [HIH-4030]  57.4,83.82 270 top
U58  HIH-4030SMD  [HIH-4030]  76.96,83.82 270 top
U59  HIH-4030SMD  [HIH-4030]  96.52,83.82 270 top
U60  HIH-4030SMD  [HIH-4030]  116.08,83.82 270 top

## Library data of the parts
E$1 = SparkFun-Retired
E$5 E$7 FID1-FID120 = SparkFun-Aesthetics
JP1-JP120 U1-U60 = SparkFun

## Nets
GND: JP1.1 U1.1
GND1: JP3.1 U2.1
GND2: JP5.1 U3.1
GND3: JP7.1 U4.1
GND4: JP9.1 U5.1
GND5: JP11.1 U6.1
GND6: JP13.1 U7.1
GND7: JP15.1 U8.1
GND8: JP17.1 U9.1
GND9: JP19.1 U10.1
GND10: JP21.1 U11.1
GND11: JP23.1 U12.1
GND12: JP25.1 U13.1
GND13: JP27.1 U14.1
GND14: JP29.1 U15.1
GND15: JP31.1 U16.1
GND16: JP33.1 U17.1
GND17: JP35.1 U18.1
GND18: JP37.1 U19.1
GND19: JP39.1 U20.1
GND20: JP41.1 U21.1
GND21: JP43.1 U22.1
GND22: JP45.1 U23.1
GND23: JP47.1 U24.1
GND24: JP49.1 U25.1
GND25: JP51.1 U26.1
GND26: JP53.1 U27.1
GND27: JP55.1 U28.1
GND28: JP57.1 U29.1
GND29: JP59.1 U30.1
GND30: JP61.1 U31.1
GND31: JP63.1 U32.1
GND32: JP65.1 U33.1
GND33: JP67.1 U34.1
GND34: JP69.1 U35.1
GND35: JP71.1 U36.1
GND36: JP73.1 U37.1
GND37: JP75.1 U38.1
GND38: JP77.1 U39.1
GND39: JP79.1 U40.1
GND40: JP81.1 U41.1
GND41: JP83.1 U42.1
GND42: JP85.1 U43.1
GND43: JP87.1 U44.1
GND44: JP89.1 U45.1
GND45: JP91.1 U46.1
GND46: JP93.1 U47.1
GND47: JP95.1 U48.1
GND48: JP97.1 U49.1
GND49: JP99.1 U50.1
GND50: JP101.1 U51.1
GND51: JP103.1 U52.1
GND52: JP105.1 U53.1
GND53: JP107.1 U54.1
GND54: JP109.1 U55.1
GND55: JP111.1 U56.1
GND56: JP113.1 U57.1
GND57: JP115.1 U58.1
GND58: JP117.1 U59.1
GND59: JP119.1 U60.1
OUT: JP1.2 U1.2
OUT1: JP3.2 U2.2
OUT2: JP5.2 U3.2
OUT3: JP7.2 U4.2
OUT4: JP9.2 U5.2
OUT5: JP11.2 U6.2
OUT6: JP13.2 U7.2
OUT7: JP15.2 U8.2
OUT8: JP17.2 U9.2
OUT9: JP19.2 U10.2
OUT10: JP21.2 U11.2
OUT11: JP23.2 U12.2
OUT12: JP25.2 U13.2
OUT13: JP27.2 U14.2
OUT14: JP29.2 U15.2
OUT15: JP31.2 U16.2
OUT16: JP33.2 U17.2
OUT17: JP35.2 U18.2
OUT18: JP37.2 U19.2
OUT19: JP39.2 U20.2
OUT20: JP41.2 U21.2
OUT21: JP43.2 U22.2
OUT22: JP45.2 U23.2
OUT23: JP47.2 U24.2
OUT24: JP49.2 U25.2
OUT25: JP51.2 U26.2
OUT26: JP53.2 U27.2
OUT27: JP55.2 U28.2
OUT28: JP57.2 U29.2
OUT29: JP59.2 U30.2
OUT30: JP61.2 U31.2
OUT31: JP63.2 U32.2
OUT32: JP65.2 U33.2
OUT33: JP67.2 U34.2
OUT34: JP69.2 U35.2
OUT35: JP71.2 U36.2
OUT36: JP73.2 U37.2
OUT37: JP75.2 U38.2
OUT38: JP77.2 U39.2
OUT39: JP79.2 U40.2
OUT40: JP81.2 U41.2
OUT41: JP83.2 U42.2
OUT42: JP85.2 U43.2
OUT43: JP87.2 U44.2
OUT44: JP89.2 U45.2
OUT45: JP91.2 U46.2
OUT46: JP93.2 U47.2
OUT47: JP95.2 U48.2
OUT48: JP97.2 U49.2
OUT49: JP99.2 U50.2
OUT50: JP101.2 U51.2
OUT51: JP103.2 U52.2
OUT52: JP105.2 U53.2
OUT53: JP107.2 U54.2
OUT54: JP109.2 U55.2
OUT55: JP111.2 U56.2
OUT56: JP113.2 U57.2
OUT57: JP115.2 U58.2
OUT58: JP117.2 U59.2
OUT59: JP119.2 U60.2
VCC: JP1.3 U1.3
VCC1: JP3.3 U2.3
VCC2: JP5.3 U3.3
VCC3: JP7.3 U4.3
VCC4: JP9.3 U5.3
VCC5: JP11.3 U6.3
VCC6: JP13.3 U7.3
VCC7: JP15.3 U8.3
VCC8: JP17.3 U9.3
VCC9: JP19.3 U10.3
VCC10: JP21.3 U11.3
VCC11: JP23.3 U12.3
VCC12: JP25.3 U13.3
VCC13: JP27.3 U14.3
VCC14: JP29.3 U15.3
VCC15: JP31.3 U16.3
VCC16: JP33.3 U17.3
VCC17: JP35.3 U18.3
VCC18: JP37.3 U19.3
VCC19: JP39.3 U20.3
VCC20: JP41.3 U21.3
VCC21: JP43.3 U22.3
VCC22: JP45.3 U23.3
VCC23: JP47.3 U24.3
VCC24: JP49.3 U25.3
VCC25: JP51.3 U26.3
VCC26: JP53.3 U27.3
VCC27: JP55.3 U28.3
VCC28: JP57.3 U29.3
VCC29: JP59.3 U30.3
VCC30: JP61.3 U31.3
VCC31: JP63.3 U32.3
VCC32: JP65.3 U33.3
VCC33: JP67.3 U34.3
VCC34: JP69.3 U35.3
VCC35: JP71.3 U36.3
VCC36: JP73.3 U37.3
VCC37: JP75.3 U38.3
VCC38: JP77.3 U39.3
VCC39: JP79.3 U40.3
VCC40: JP81.3 U41.3
VCC41: JP83.3 U42.3
VCC42: JP85.3 U43.3
VCC43: JP87.3 U44.3
VCC44: JP89.3 U45.3
VCC45: JP91.3 U46.3
VCC46: JP93.3 U47.3
VCC47: JP95.3 U48.3
VCC48: JP97.3 U49.3
VCC49: JP99.3 U50.3
VCC50: JP101.3 U51.3
VCC51: JP103.3 U52.3
VCC52: JP105.3 U53.3
VCC53: JP107.3 U54.3
VCC54: JP109.3 U55.3
VCC55: JP111.3 U56.3
VCC56: JP113.3 U57.3
VCC57: JP115.3 U58.3
VCC58: JP117.3 U59.3
VCC59: JP119.3 U60.3

## Tracks (layer width: path | path; a pad name or v marks a point on that pad's centre or on a via)
GND
  Top 0.508: U1.1 9.4,11.94 JP1.1
GND1
  Top 0.508: U2.1 28.96,11.94 JP3.1
GND2
  Top 0.508: U3.1 48.51,11.94 JP5.1
GND3
  Top 0.508: U4.1 68.07,11.94 JP7.1
GND4
  Top 0.508: U5.1 87.63,11.94 JP9.1
GND5
  Top 0.508: U6.1 107.19,11.94 JP11.1
GND6
  Top 0.508: U7.1 9.4,20.07 JP13.1
GND7
  Top 0.508: U8.1 28.96,20.07 JP15.1
GND8
  Top 0.508: U9.1 48.51,20.07 JP17.1
GND9
  Top 0.508: U10.1 68.07,20.07 JP19.1
GND10
  Top 0.508: U11.1 87.63,20.07 JP21.1
GND11
  Top 0.508: U12.1 107.19,20.07 JP23.1
GND12
  Top 0.508: U13.1 9.4,28.19 JP25.1
GND13
  Top 0.508: U14.1 28.96,28.19 JP27.1
GND14
  Top 0.508: U15.1 48.51,28.19 JP29.1
GND15
  Top 0.508: U16.1 68.07,28.19 JP31.1
GND16
  Top 0.508: U17.1 87.63,28.19 JP33.1
GND17
  Top 0.508: U18.1 107.19,28.19 JP35.1
GND18
  Top 0.508: U19.1 9.4,36.32 JP37.1
GND19
  Top 0.508: U20.1 28.96,36.32 JP39.1
GND20
  Top 0.508: U21.1 48.51,36.32 JP41.1
GND21
  Top 0.508: U22.1 68.07,36.32 JP43.1
GND22
  Top 0.508: U23.1 87.63,36.32 JP45.1
GND23
  Top 0.508: U24.1 107.19,36.32 JP47.1
GND24
  Top 0.508: U25.1 9.4,44.45 JP49.1
GND25
  Top 0.508: U26.1 28.96,44.45 JP51.1
GND26
  Top 0.508: U27.1 48.51,44.45 JP53.1
GND27
  Top 0.508: U28.1 68.07,44.45 JP55.1
GND28
  Top 0.508: U29.1 87.63,44.45 JP57.1
GND29
  Top 0.508: U30.1 107.19,44.45 JP59.1
GND30
  Top 0.508: U31.1 9.4,52.58 JP61.1
GND31
  Top 0.508: U32.1 28.96,52.58 JP63.1
GND32
  Top 0.508: U33.1 48.51,52.58 JP65.1
GND33
  Top 0.508: U34.1 68.07,52.58 JP67.1
GND34
  Top 0.508: U35.1 87.63,52.58 JP69.1
GND35
  Top 0.508: U36.1 107.19,52.58 JP71.1
GND36
  Top 0.508: U37.1 9.4,60.71 JP73.1
GND37
  Top 0.508: U38.1 28.96,60.71 JP75.1
GND38
  Top 0.508: U39.1 48.51,60.71 JP77.1
GND39
  Top 0.508: U40.1 68.07,60.71 JP79.1
GND40
  Top 0.508: U41.1 87.63,60.71 JP81.1
GND41
  Top 0.508: U42.1 107.19,60.71 JP83.1
GND42
  Top 0.508: U43.1 9.4,68.83 JP85.1
GND43
  Top 0.508: U44.1 28.96,68.83 JP87.1
GND44
  Top 0.508: U45.1 48.51,68.83 JP89.1
GND45
  Top 0.508: U46.1 68.07,68.83 JP91.1
GND46
  Top 0.508: U47.1 87.63,68.83 JP93.1
GND47
  Top 0.508: U48.1 107.19,68.83 JP95.1
GND48
  Top 0.508: U49.1 9.4,76.96 JP97.1
GND49
  Top 0.508: U50.1 28.96,76.96 JP99.1
GND50
  Top 0.508: U51.1 48.51,76.96 JP101.1
GND51
  Top 0.508: U52.1 68.07,76.96 JP103.1
GND52
  Top 0.508: U53.1 87.63,76.96 JP105.1
GND53
  Top 0.508: U54.1 107.19,76.96 JP107.1
GND54
  Top 0.508: U55.1 9.4,85.09 JP109.1
GND55
  Top 0.508: U56.1 28.96,85.09 JP111.1
GND56
  Top 0.508: U57.1 48.51,85.09 JP113.1
GND57
  Top 0.508: U58.1 68.07,85.09 JP115.1
GND58
  Top 0.508: U59.1 87.63,85.09 JP117.1
GND59
  Top 0.508: U60.1 107.19,85.09 JP119.1
OUT
  Top 0.254: U1.2 11.94,10.67
  Top 0.508: JP1.2 U1.2
OUT1
  Top 0.254: U2.2 31.5,10.67
  Top 0.508: JP3.2 U2.2
OUT2
  Top 0.254: U3.2 51.05,10.67
  Top 0.508: JP5.2 U3.2
OUT3
  Top 0.254: U4.2 70.61,10.67
  Top 0.508: JP7.2 U4.2
OUT4
  Top 0.254: U5.2 90.17,10.67
  Top 0.508: JP9.2 U5.2
OUT5
  Top 0.254: U6.2 109.73,10.67
  Top 0.508: JP11.2 U6.2
OUT6
  Top 0.254: U7.2 11.94,18.8
  Top 0.508: JP13.2 U7.2
OUT7
  Top 0.254: U8.2 31.5,18.8
  Top 0.508: JP15.2 U8.2
OUT8
  Top 0.254: U9.2 51.05,18.8
  Top 0.508: JP17.2 U9.2
OUT9
  Top 0.254: U10.2 70.61,18.8
  Top 0.508: JP19.2 U10.2
OUT10
  Top 0.254: U11.2 90.17,18.8
  Top 0.508: JP21.2 U11.2
OUT11
  Top 0.254: U12.2 109.73,18.8
  Top 0.508: JP23.2 U12.2
OUT12
  Top 0.254: U13.2 11.94,26.92
  Top 0.508: JP25.2 U13.2
OUT13
  Top 0.254: U14.2 31.5,26.92
  Top 0.508: JP27.2 U14.2
OUT14
  Top 0.254: U15.2 51.05,26.92
  Top 0.508: JP29.2 U15.2
OUT15
  Top 0.254: U16.2 70.61,26.92
  Top 0.508: JP31.2 U16.2
OUT16
  Top 0.254: U17.2 90.17,26.92
  Top 0.508: JP33.2 U17.2
OUT17
  Top 0.254: U18.2 109.73,26.92
  Top 0.508: JP35.2 U18.2
OUT18
  Top 0.254: U19.2 11.94,35.05
  Top 0.508: JP37.2 U19.2
OUT19
  Top 0.254: U20.2 31.5,35.05
  Top 0.508: JP39.2 U20.2
OUT20
  Top 0.254: U21.2 51.05,35.05
  Top 0.508: JP41.2 U21.2
OUT21
  Top 0.254: U22.2 70.61,35.05
  Top 0.508: JP43.2 U22.2
OUT22
  Top 0.254: U23.2 90.17,35.05
  Top 0.508: JP45.2 U23.2
OUT23
  Top 0.254: U24.2 109.73,35.05
  Top 0.508: JP47.2 U24.2
OUT24
  Top 0.254: U25.2 11.94,43.18
  Top 0.508: JP49.2 U25.2
OUT25
  Top 0.254: U26.2 31.5,43.18
  Top 0.508: JP51.2 U26.2
OUT26
  Top 0.254: U27.2 51.05,43.18
  Top 0.508: JP53.2 U27.2
OUT27
  Top 0.254: U28.2 70.61,43.18
  Top 0.508: JP55.2 U28.2
OUT28
  Top 0.254: U29.2 90.17,43.18
  Top 0.508: JP57.2 U29.2
OUT29
  Top 0.254: U30.2 109.73,43.18
  Top 0.508: JP59.2 U30.2
OUT30
  Top 0.254: U31.2 11.94,51.31
  Top 0.508: JP61.2 U31.2
OUT31
  Top 0.254: U32.2 31.5,51.31
  Top 0.508: JP63.2 U32.2
OUT32
  Top 0.254: U33.2 51.05,51.31
  Top 0.508: JP65.2 U33.2
OUT33
  Top 0.254: U34.2 70.61,51.31
  Top 0.508: JP67.2 U34.2
OUT34
  Top 0.254: U35.2 90.17,51.31
  Top 0.508: JP69.2 U35.2
OUT35
  Top 0.254: U36.2 109.73,51.31
  Top 0.508: JP71.2 U36.2
OUT36
  Top 0.254: U37.2 11.94,59.44
  Top 0.508: JP73.2 U37.2
OUT37
  Top 0.254: U38.2 31.5,59.44
  Top 0.508: JP75.2 U38.2
OUT38
  Top 0.254: U39.2 51.05,59.44
  Top 0.508: JP77.2 U39.2
OUT39
  Top 0.254: U40.2 70.61,59.44
  Top 0.508: JP79.2 U40.2
OUT40
  Top 0.254: U41.2 90.17,59.44
  Top 0.508: JP81.2 U41.2
OUT41
  Top 0.254: U42.2 109.73,59.44
  Top 0.508: JP83.2 U42.2
OUT42
  Top 0.254: U43.2 11.94,67.56
  Top 0.508: JP85.2 U43.2
OUT43
  Top 0.254: U44.2 31.5,67.56
  Top 0.508: JP87.2 U44.2
OUT44
  Top 0.254: U45.2 51.05,67.56
  Top 0.508: JP89.2 U45.2
OUT45
  Top 0.254: U46.2 70.61,67.56
  Top 0.508: JP91.2 U46.2
OUT46
  Top 0.254: U47.2 90.17,67.56
  Top 0.508: JP93.2 U47.2
OUT47
  Top 0.254: U48.2 109.73,67.56
  Top 0.508: JP95.2 U48.2
OUT48
  Top 0.254: U49.2 11.94,75.69
  Top 0.508: JP97.2 U49.2
OUT49
  Top 0.254: U50.2 31.5,75.69
  Top 0.508: JP99.2 U50.2
OUT50
  Top 0.254: U51.2 51.05,75.69
  Top 0.508: JP101.2 U51.2
OUT51
  Top 0.254: U52.2 70.61,75.69
  Top 0.508: JP103.2 U52.2
OUT52
  Top 0.254: U53.2 90.17,75.69
  Top 0.508: JP105.2 U53.2
OUT53
  Top 0.254: U54.2 109.73,75.69
  Top 0.508: JP107.2 U54.2
OUT54
  Top 0.254: U55.2 11.94,83.82
  Top 0.508: JP109.2 U55.2
OUT55
  Top 0.254: U56.2 31.5,83.82
  Top 0.508: JP111.2 U56.2
OUT56
  Top 0.254: U57.2 51.05,83.82
  Top 0.508: JP113.2 U57.2
OUT57
  Top 0.254: U58.2 70.61,83.82
  Top 0.508: JP115.2 U58.2
OUT58
  Top 0.254: U59.2 90.17,83.82
  Top 0.508: JP117.2 U59.2
OUT59
  Top 0.254: U60.2 109.73,83.82
  Top 0.508: JP119.2 U60.2
VCC
  Top 0.508: U1.3 9.4,9.4 JP1.3
VCC1
  Top 0.508: U2.3 28.96,9.4 JP3.3
VCC2
  Top 0.508: U3.3 48.51,9.4 JP5.3
VCC3
  Top 0.508: U4.3 68.07,9.4 JP7.3
VCC4
  Top 0.508: U5.3 87.63,9.4 JP9.3
VCC5
  Top 0.508: U6.3 107.19,9.4 JP11.3
VCC6
  Top 0.508: U7.3 9.4,17.53 JP13.3
VCC7
  Top 0.508: U8.3 28.96,17.53 JP15.3
VCC8
  Top 0.508: U9.3 48.51,17.53 JP17.3
VCC9
  Top 0.508: U10.3 68.07,17.53 JP19.3
VCC10
  Top 0.508: U11.3 87.63,17.53 JP21.3
VCC11
  Top 0.508: U12.3 107.19,17.53 JP23.3
VCC12
  Top 0.508: U13.3 9.4,25.65 JP25.3
VCC13
  Top 0.508: U14.3 28.96,25.65 JP27.3
VCC14
  Top 0.508: U15.3 48.51,25.65 JP29.3
VCC15
  Top 0.508: U16.3 68.07,25.65 JP31.3
VCC16
  Top 0.508: U17.3 87.63,25.65 JP33.3
VCC17
  Top 0.508: U18.3 107.19,25.65 JP35.3
VCC18
  Top 0.508: U19.3 9.4,33.78 JP37.3
VCC19
  Top 0.508: U20.3 28.96,33.78 JP39.3
VCC20
  Top 0.508: U21.3 48.51,33.78 JP41.3
VCC21
  Top 0.508: U22.3 68.07,33.78 JP43.3
VCC22
  Top 0.508: U23.3 87.63,33.78 JP45.3
VCC23
  Top 0.508: U24.3 107.19,33.78 JP47.3
VCC24
  Top 0.508: U25.3 9.4,41.91 JP49.3
VCC25
  Top 0.508: U26.3 28.96,41.91 JP51.3
VCC26
  Top 0.508: U27.3 48.51,41.91 JP53.3
VCC27
  Top 0.508: U28.3 68.07,41.91 JP55.3
VCC28
  Top 0.508: U29.3 87.63,41.91 JP57.3
VCC29
  Top 0.508: U30.3 107.19,41.91 JP59.3
VCC30
  Top 0.508: U31.3 9.4,50.04 JP61.3
VCC31
  Top 0.508: U32.3 28.96,50.04 JP63.3
VCC32
  Top 0.508: U33.3 48.51,50.04 JP65.3
VCC33
  Top 0.508: U34.3 68.07,50.04 JP67.3
VCC34
  Top 0.508: U35.3 87.63,50.04 JP69.3
VCC35
  Top 0.508: U36.3 107.19,50.04 JP71.3
VCC36
  Top 0.508: U37.3 9.4,58.17 JP73.3
VCC37
  Top 0.508: U38.3 28.96,58.17 JP75.3
VCC38
  Top 0.508: U39.3 48.51,58.17 JP77.3
VCC39
  Top 0.508: U40.3 68.07,58.17 JP79.3
VCC40
  Top 0.508: U41.3 87.63,58.17 JP81.3
VCC41
  Top 0.508: U42.3 107.19,58.17 JP83.3
VCC42
  Top 0.508: U43.3 9.4,66.29 JP85.3
VCC43
  Top 0.508: U44.3 28.96,66.29 JP87.3
VCC44
  Top 0.508: U45.3 48.51,66.29 JP89.3
VCC45
  Top 0.508: U46.3 68.07,66.29 JP91.3
VCC46
  Top 0.508: U47.3 87.63,66.29 JP93.3
VCC47
  Top 0.508: U48.3 107.19,66.29 JP95.3
VCC48
  Top 0.508: U49.3 9.4,74.42 JP97.3
VCC49
  Top 0.508: U50.3 28.96,74.42 JP99.3
VCC50
  Top 0.508: U51.3 48.51,74.42 JP101.3
VCC51
  Top 0.508: U52.3 68.07,74.42 JP103.3
VCC52
  Top 0.508: U53.3 87.63,74.42 JP105.3
VCC53
  Top 0.508: U54.3 107.19,74.42 JP107.3
VCC54
  Top 0.508: U55.3 9.4,82.55 JP109.3
VCC55
  Top 0.508: U56.3 28.96,82.55 JP111.3
VCC56
  Top 0.508: U57.3 48.51,82.55 JP113.3
VCC57
  Top 0.508: U58.3 68.07,82.55 JP115.3
VCC58
  Top 0.508: U59.3 87.63,82.55 JP117.3
VCC59
  Top 0.508: U60.3 107.19,82.55 JP119.3

## Text on the board
tPlace: GND | GND | GND | GND | GND | GND | OUT | OUT | OUT | OUT | OUT | OUT | 5V | 5V | 5V | 5V | 5V | 5V | Humidity Sensor | Humidity Sensor | Humidity Sensor | Humidity Sensor | Humidity Sensor | Humidity Sensor | GND | GND | GND | GND | GND | GND | OUT | OUT | OUT | OUT | OUT | OUT | 5V | 5V | 5V | 5V | 5V | 5V | Humidity Sensor | Humidity Sensor | Humidity Sensor | Humidity Sensor | Humidity Sensor | Humidity Sensor | GND | GND | GND | GND | GND | GND | OUT | OUT | OUT | OUT | OUT | OUT | 5V | 5V | 5V | 5V | 5V | 5V | Humidity Sensor | Humidity Sensor | Humidity Sensor | Humidity Sensor | Humidity Sensor | Humidity Sensor | GND | GND | GND | GND | GND | GND | OUT | OUT | OUT | OUT | OUT | OUT | 5V | 5V | 5V | 5V | 5V | 5V | Humidity Sensor | Humidity Sensor | Humidity Sensor | Humidity Sensor | Humidity Sensor | Humidity Sensor | GND | GND | GND | GND | GND | GND | OUT | OUT | OUT | OUT | OUT | OUT | 5V | 5V | 5V | 5V | 5V | 5V | Humidity Sensor | Humidity Sensor | Humidity Sensor | Humidity Sensor | Humidity Sensor | Humidity Sensor | GND | GND | GND | GND | GND | GND | OUT | OUT | OUT | OUT | OUT | OUT | 5V | 5V | 5V | 5V | 5V | 5V | Humidity Sensor | Humidity Sensor | Humidity Sensor | Humidity Sensor | Humidity Sensor | Humidity Sensor | GND | GND | GND | GND | GND | GND | OUT | OUT | OUT | OUT | OUT | OUT | 5V | 5V | 5V | 5V | 5V | 5V | Humidity Sensor | Humidity Sensor | Humidity Sensor | Humidity Sensor | Humidity Sensor | Humidity Sensor | GND | GND | GND | GND | GND | GND | OUT | OUT | OUT | OUT | OUT | OUT | 5V | 5V | 5V | 5V | 5V | 5V | Humidity Sensor | Humidity Sensor | Humidity Sensor | Humidity Sensor | Humidity Sensor | Humidity Sensor | GND | GND | GND | GND | GND | GND | OUT | OUT | OUT | OUT | OUT | OUT | 5V | 5V | 5V | 5V | 5V | 5V | Humidity Sensor | Humidity Sensor | Humidity Sensor | Humidity Sensor | Humidity Sensor | Humidity Sensor | GND | GND | GND | GND | GND | GND | OUT | OUT | OUT | OUT | OUT | OUT | 5V | 5V | 5V | 5V | 5V | 5V | Humidity Sensor | Humidity Sensor | Humidity Sensor | Humidity Sensor | Humidity Sensor | Humidity Sensor
bPlace: GND | GND | GND | GND | GND | GND | OUT | OUT | OUT | OUT | OUT | OUT | 5V | 5V | 5V | 5V | 5V | 5V | GND | GND | GND | GND | GND | GND | OUT | OUT | OUT | OUT | OUT | OUT | 5V | 5V | 5V | 5V | 5V | 5V | GND | GND | GND | GND | GND | GND | OUT | OUT | OUT | OUT | OUT | OUT | 5V | 5V | 5V | 5V | 5V | 5V | GND | GND | GND | GND | GND | GND | OUT | OUT | OUT | OUT | OUT | OUT | 5V | 5V | 5V | 5V | 5V | 5V | GND | GND | GND | GND | GND | GND | OUT | OUT | OUT | OUT | OUT | OUT | 5V | 5V | 5V | 5V | 5V | 5V | GND | GND | GND | GND | GND | GND | OUT | OUT | OUT | OUT | OUT | OUT | 5V | 5V | 5V | 5V | 5V | 5V | GND | GND | GND | GND | GND | GND | OUT | OUT | OUT | OUT | OUT | OUT | 5V | 5V | 5V | 5V | 5V | 5V | GND | GND | GND | GND | GND | GND | OUT | OUT | OUT | OUT | OUT | OUT | 5V | 5V | 5V | 5V | 5V | 5V | GND | GND | GND | GND | GND | GND | OUT | OUT | OUT | OUT | OUT | OUT | 5V | 5V | 5V | 5V | 5V | 5V | GND | GND | GND | GND | GND | GND | OUT | OUT | OUT | OUT | OUT | OUT | 5V | 5V | 5V | 5V | 5V | 5V